# EAGLE board breakout_too (EAGLE 7.5.0)
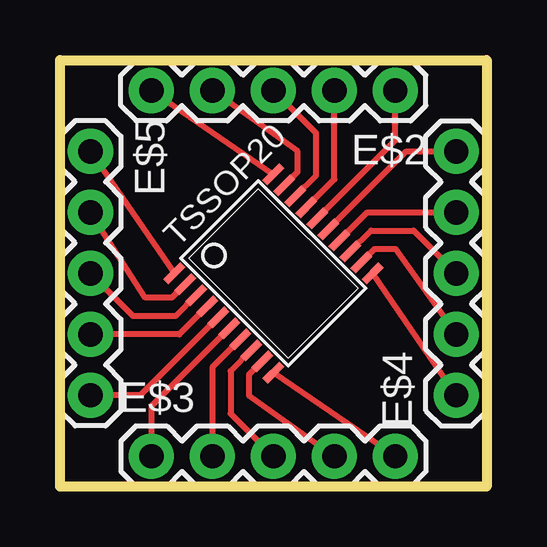
[diagram p0: board, top side]

Size 17.78 x 17.78 mm. Coordinates in mm from the lower left corner, seen from the top.
Outline: 0,17.78 17.78,17.78 17.78,0 0,0 0,17.78
Copper layers (1*16): Top 0.035mm / dielectric 1.5mm / Bottom 0.035mm
Design rules "default": minimum track width 10mil, minimum drill 24mil, track to track 8mil, track to pad 8mil, pad to pad 8mil, via to via 8mil, smd to smd 8mil, copper to edge 40mil, drill to drill 8mil, minimum pad ring 10mil, minimum via ring 8mil, stop-mask expansion 4mil, vias tented up to drill 0mil, thermal gap 10mil

## Footprints (pad centres in the part's own frame; a part is rotated, then mirrored left to right if it is on the bottom)
1X05 = drill 1.016 pad 1.88: 1 0,0; 2 2.54,0; 3 5.08,0; 4 7.62,0; 5 10.16,0
TSSOP20 = smd 0.305 x 0.991: 1 -2.925,-2.918; 2 -2.275,-2.918; 3 -1.625,-2.918; 4 -0.975,-2.918; 5 -0.325,-2.918; 6 0.325,-2.918; 7 0.975,-2.918; 8 1.625,-2.918; 9 2.275,-2.918; 10 2.925,-2.918; 11 2.925,2.918; 12 2.275,2.918; 13 1.625,2.918; 14 0.975,2.918; 15 0.325,2.918; 16 -0.325,2.918; 17 -0.975,2.918; 18 -1.625,2.918; 19 -2.275,2.918; 20 -2.925,2.918

## Placement (x,y rotation side)
E$2  [1X05]  13.97,16.51 180 top
E$3  [1X05]  3.81,1.27 0 top
E$4  [1X05]  16.51,3.81 90 top
E$5  [1X05]  1.27,13.97 270 top
TSSOP20  [TSSOP20]  8.89,8.89 315 top

## Library data of the parts
E$2-E$5 = SparkFun-Connectors
TSSOP20 = ref-packages-longpad

## Nets
S$1: E$2.5 TSSOP20.20
S$2: E$2.4 TSSOP20.19
S$3: E$2.3 TSSOP20.18
S$4: E$2.2 TSSOP20.17
S$5: E$2.1 TSSOP20.16
S$6: E$4.5 TSSOP20.15
S$7: E$4.4 TSSOP20.14
S$8: E$4.3 TSSOP20.13
S$9: E$4.2 TSSOP20.12
S$10: E$4.1 TSSOP20.11
S$11: E$3.5 TSSOP20.10
S$12: E$3.4 TSSOP20.9
S$13: E$3.3 TSSOP20.8
S$14: E$3.2 TSSOP20.7
S$15: E$3.1 TSSOP20.6
S$16: E$5.5 TSSOP20.5
S$17: E$5.1 TSSOP20.1
S$18: E$5.2 TSSOP20.2
S$19: E$5.3 TSSOP20.3
S$20: E$5.4 TSSOP20.4

## Tracks (layer width: path | path; a pad name or v marks a point on that pad's centre or on a via)
S$1
  Top 0.254: E$2.5 TSSOP20.20
S$2
  Top 0.254: TSSOP20.19 9.91,13.12 9.91,13.97 E$2.4
S$3
  Top 0.254: TSSOP20.18 10.67,12.97 10.67,14.73 E$2.3
S$4
  Top 0.254: TSSOP20.17 11.43,12.81 E$2.2
S$5
  Top 0.254: TSSOP20.16 13.97,14.43 E$2.1
S$6
  Top 0.254: TSSOP20.15 14.43,13.97 E$4.5
S$7
  Top 0.254: TSSOP20.14 12.81,11.43 E$4.4
S$8
  Top 0.254: TSSOP20.13 12.97,10.67 14.73,10.67 E$4.3
S$9
  Top 0.254: TSSOP20.12 13.12,9.91 13.97,9.91 E$4.2
S$10
  Top 0.254: E$4.1 TSSOP20.11
S$11
  Top 0.254: E$3.5 TSSOP20.10
S$12
  Top 0.254: TSSOP20.9 7.87,4.66 7.87,3.81 E$3.4
S$13
  Top 0.254: TSSOP20.8 7.11,4.81 7.11,3.05 E$3.3
S$14
  Top 0.254: TSSOP20.7 6.35,4.97 E$3.2
S$15
  Top 0.254: TSSOP20.6 3.81,3.35 E$3.1
S$16
  Top 0.254: TSSOP20.5 3.35,3.81 E$5.5
S$17
  Top 0.254: E$5.1 TSSOP20.1
S$18
  Top 0.254: TSSOP20.2 4.66,7.87 3.56,7.87 E$5.2
S$19
  Top 0.254: TSSOP20.3 4.81,7.11 3.05,7.11 E$5.3
S$20
  Top 0.254: TSSOP20.4 4.97,6.35 E$5.4